# Altium PCB Relay PCB.PcbDoc
Units mm, origin at the board's own origin, x right, y up, seen from the top; angles counter-clockwise.
Board outline 102.36 x 178.55 mm, 4 copper layers (12V, GND, 5V, Signal); 84 components, 70 nets, 365 pads, 27 vias.
Unrouted connection lines stored in the file: 1.
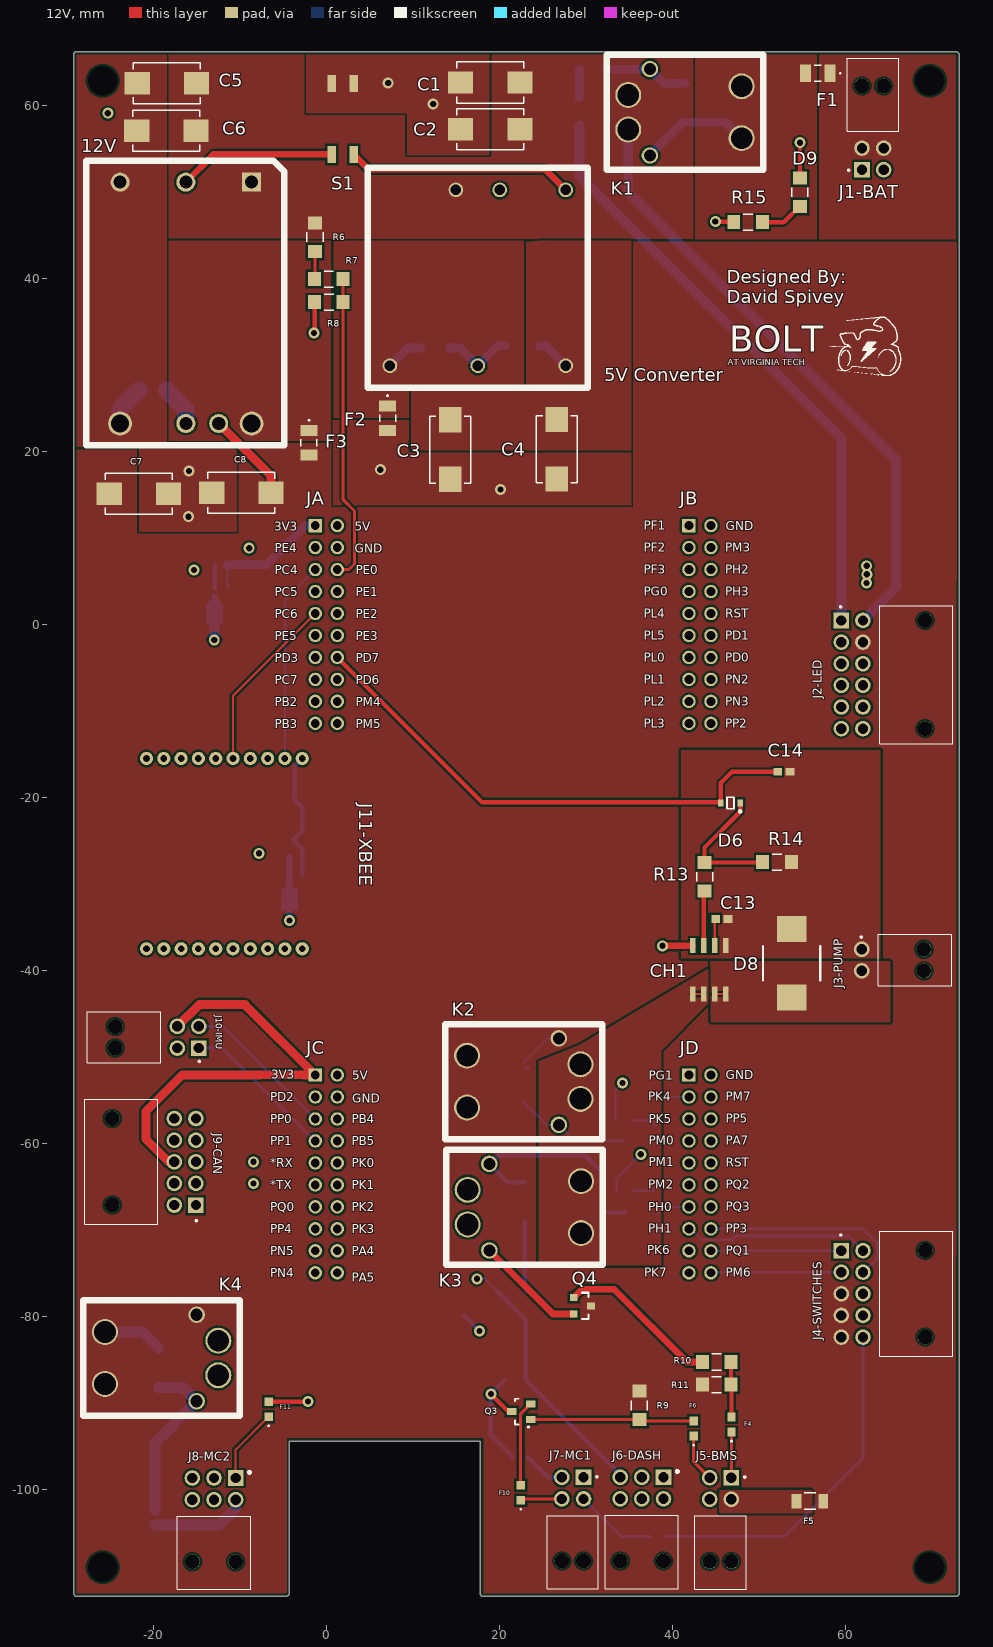
[diagram p0: 12V view]
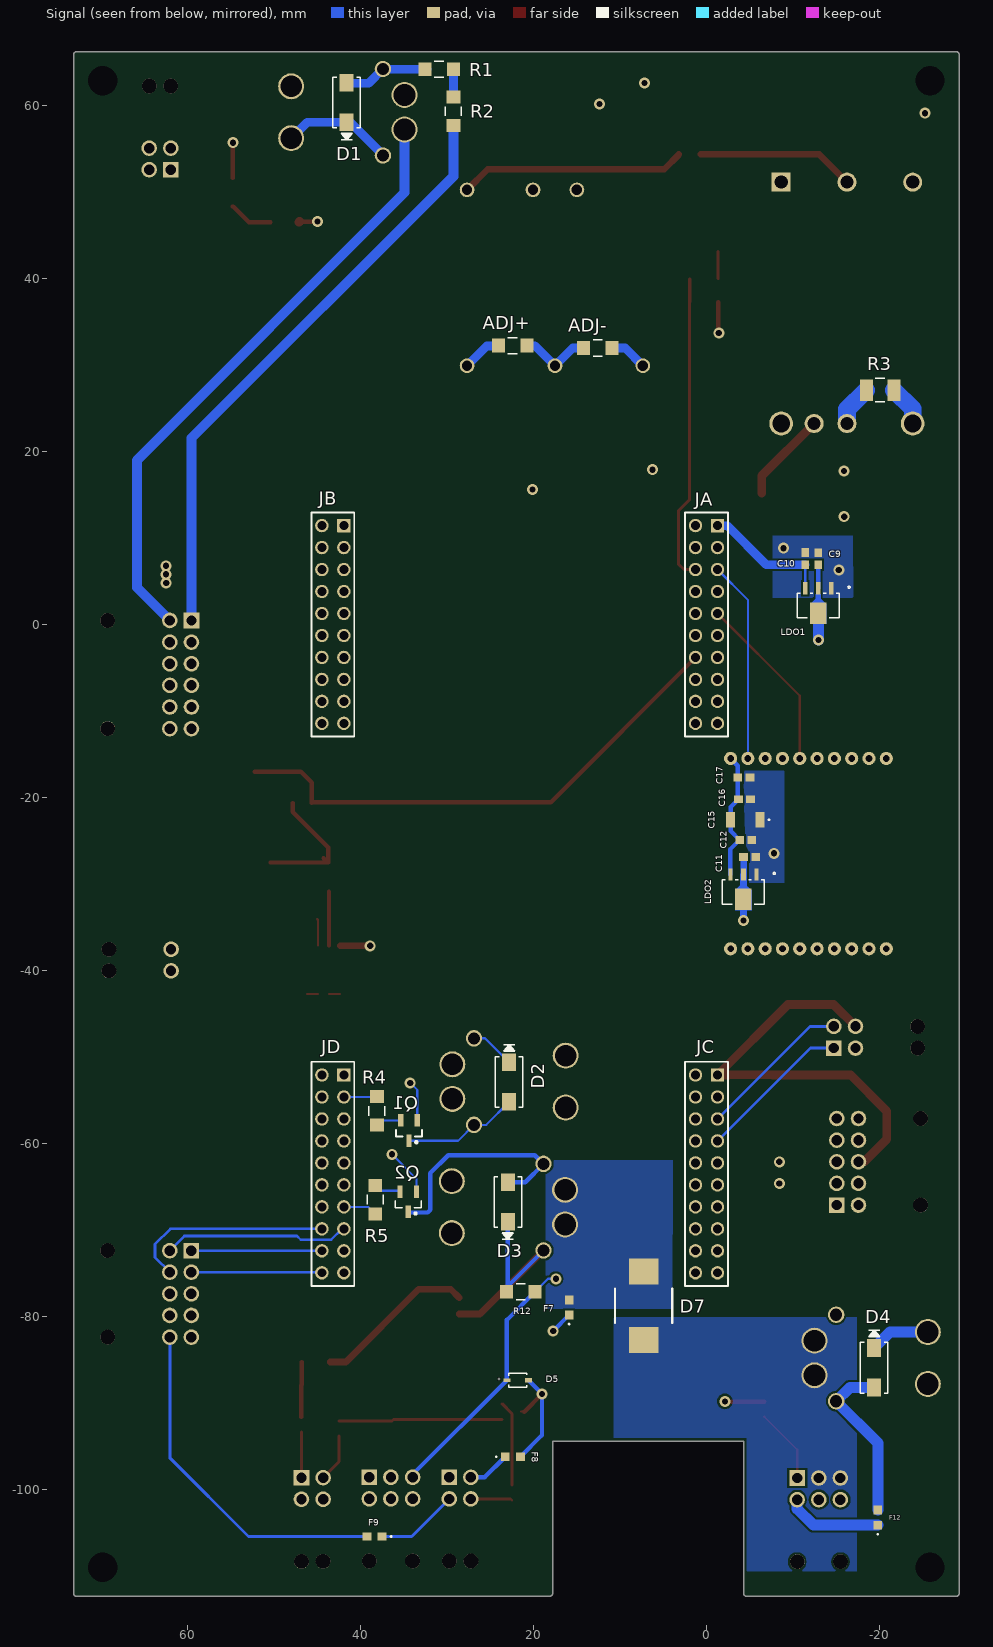
[diagram p1: Signal view, seen from below]
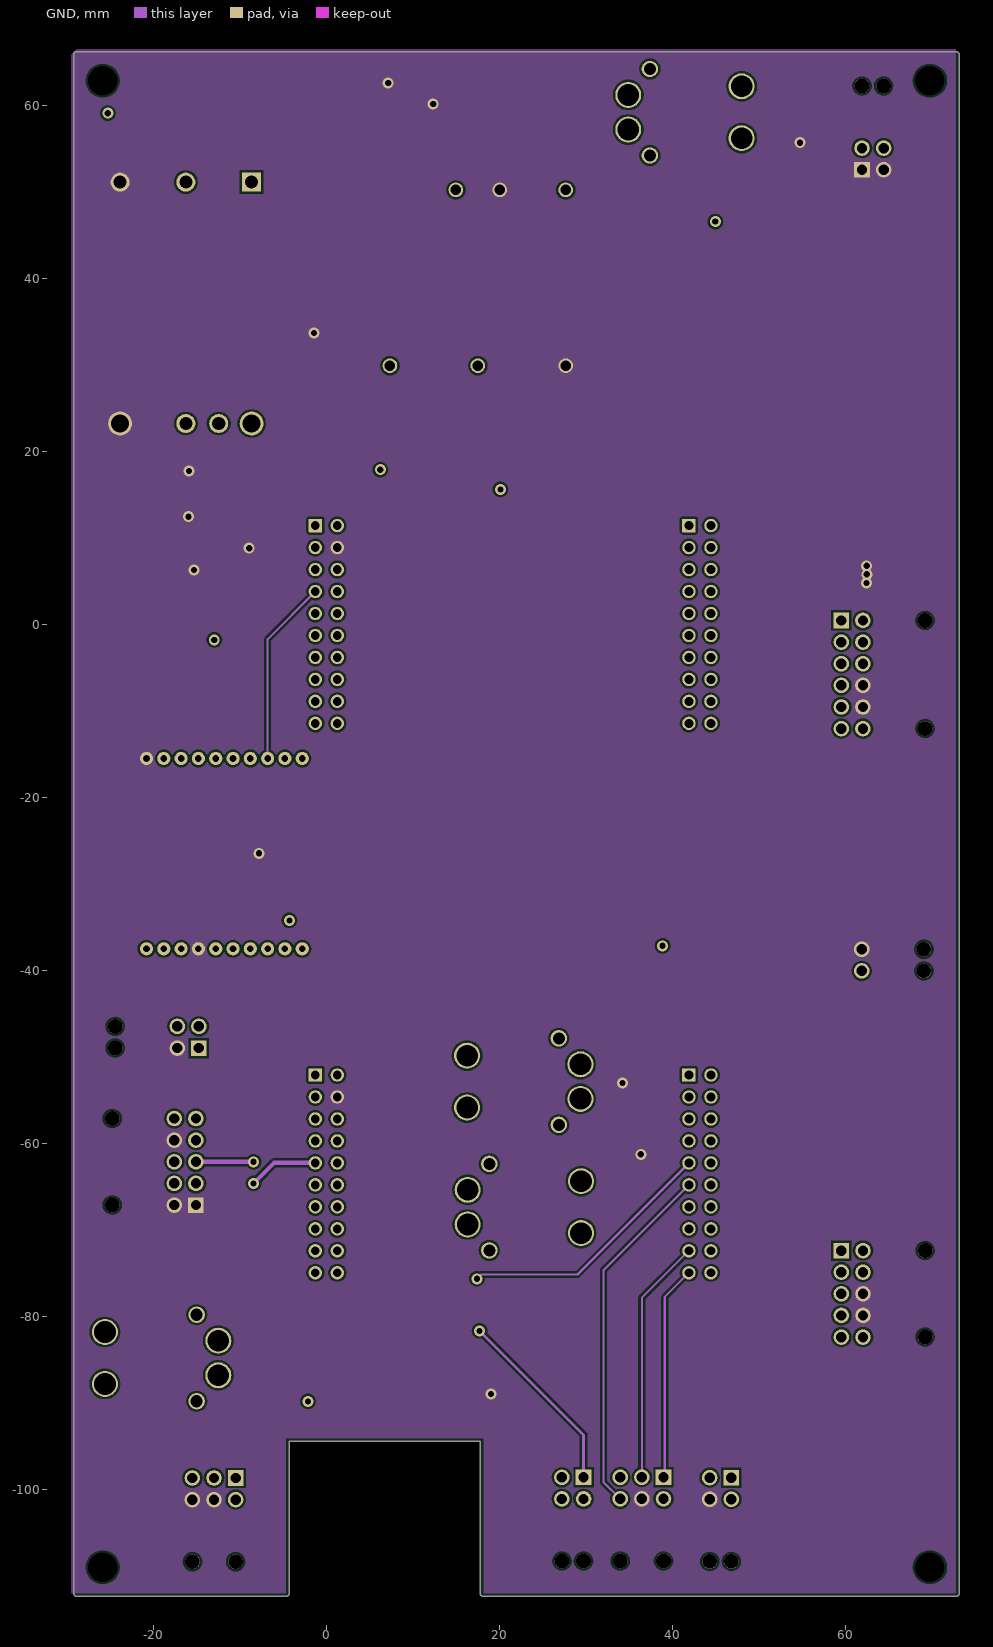
[diagram p2: GND]
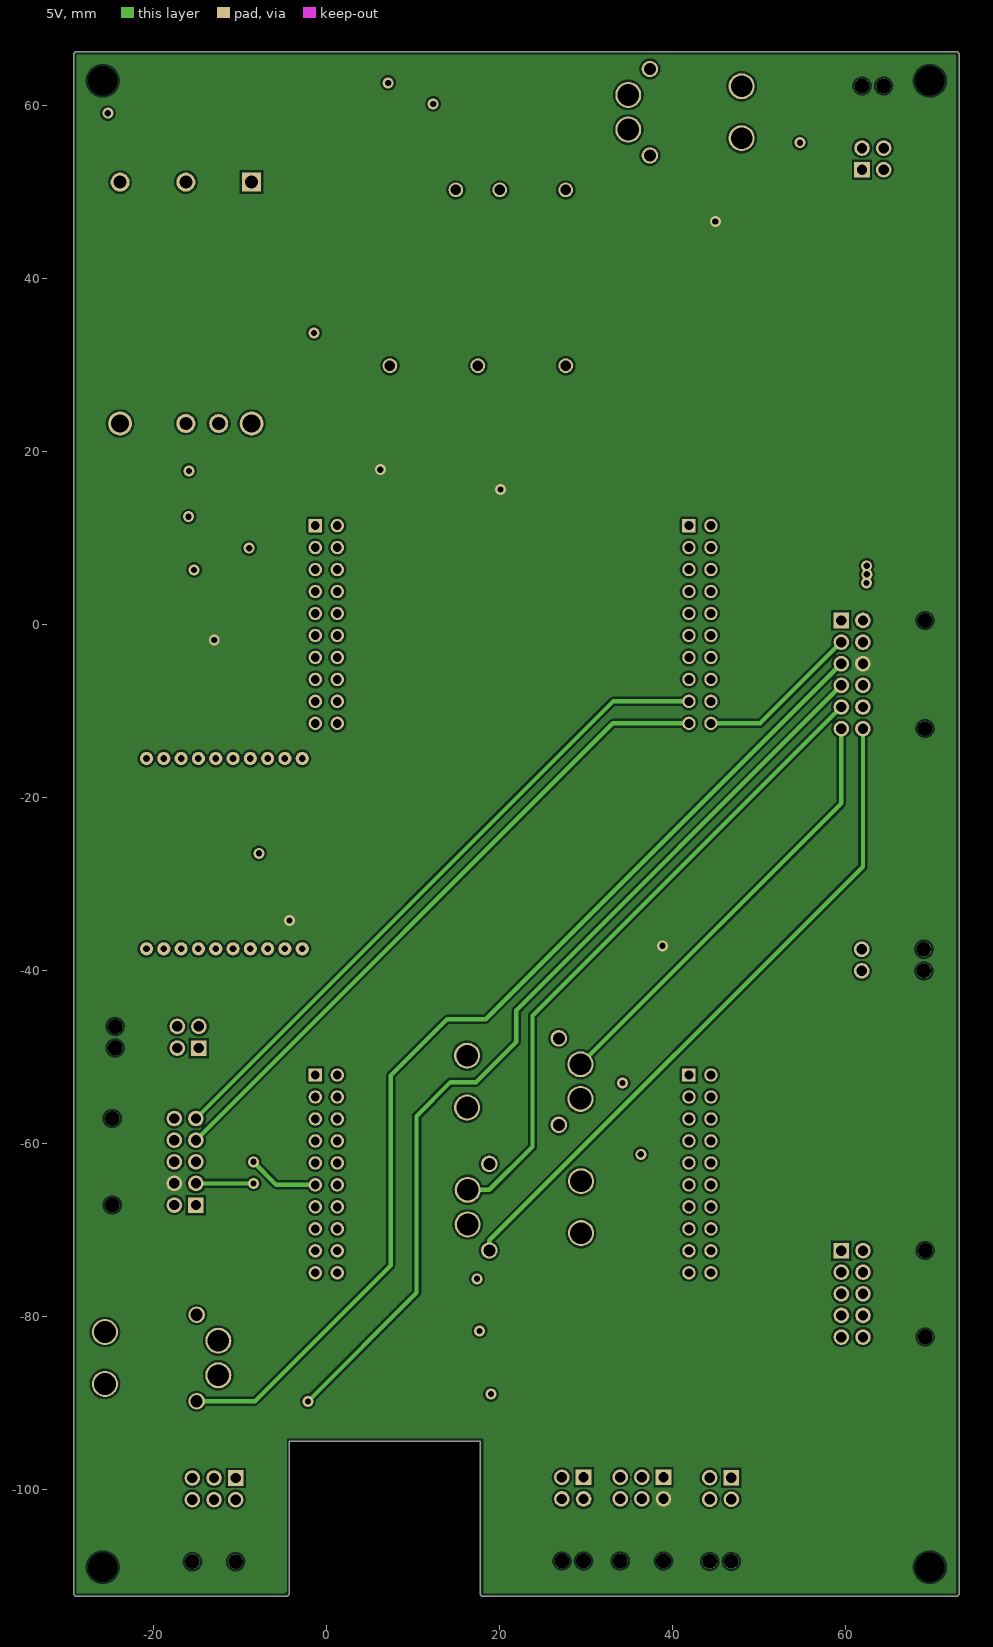
[diagram p3: 5V]
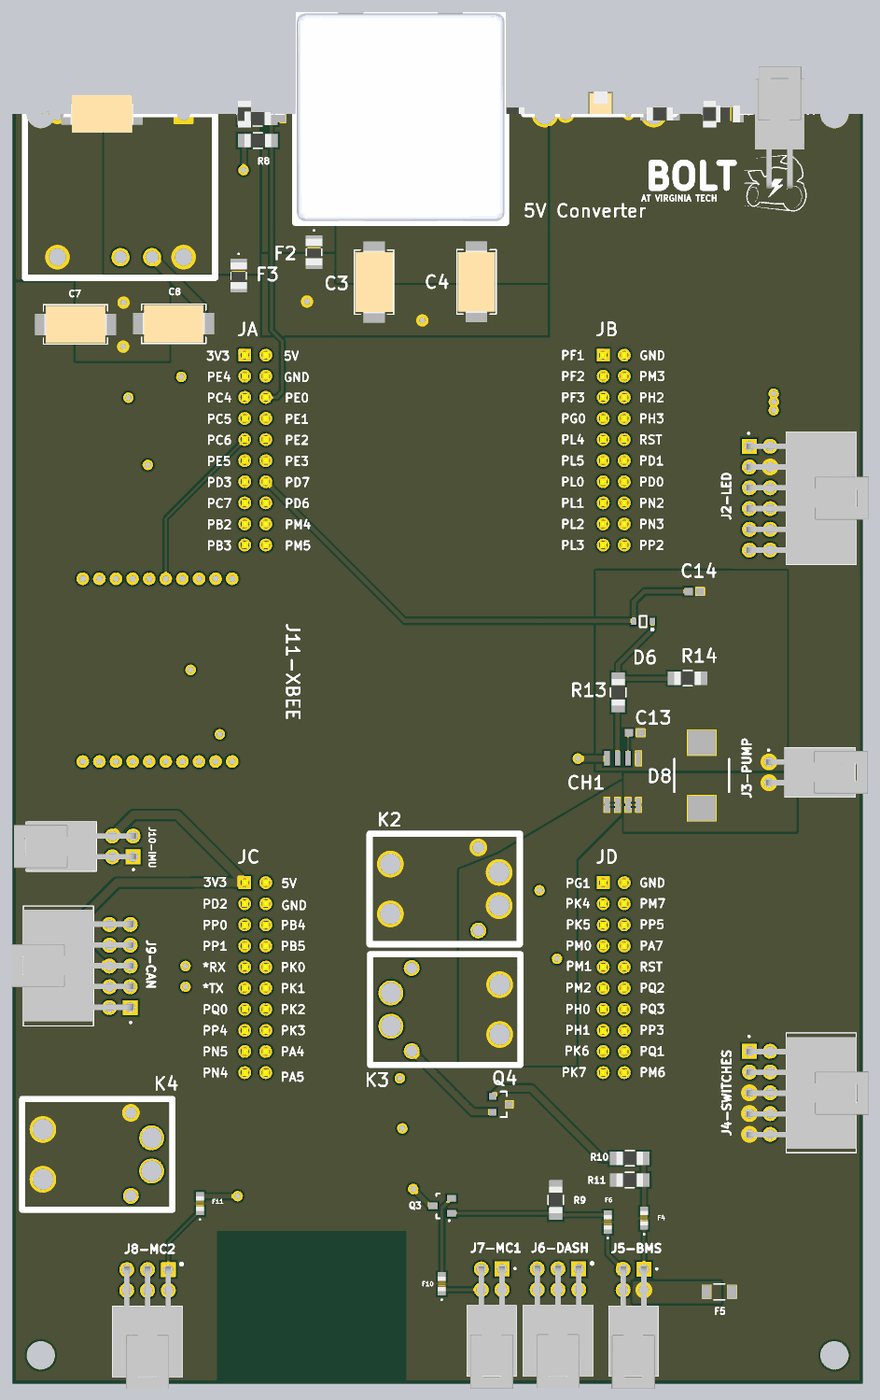
[diagram p4: 3D render of the assembled board from above, using the file's embedded part models]
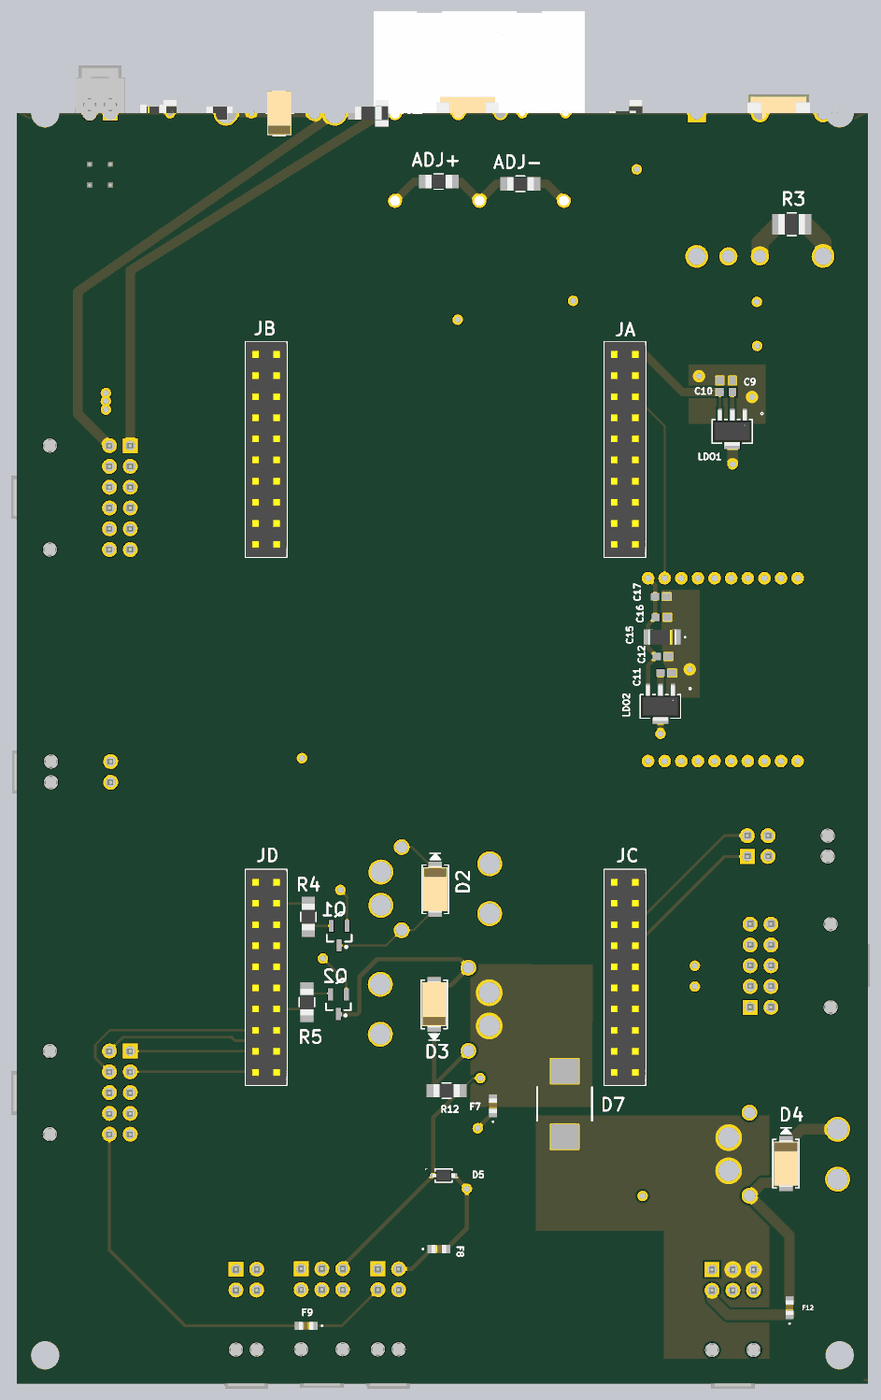
[diagram p5: 3D render of the assembled board from below, using the file's embedded part models]

## Layer stack, top to bottom
Top Solder: solder mask 0.0102, Solder Resist, Dk 3.5
12V: signal copper 0.0356
Dielectric 1: dielectric 0.32, FR-4, Dk 4.8
GND: signal copper 0.0356
Dielectric2: dielectric 0.32, FR-4, Dk 4.8
5V: signal copper 0.0356
Dielectric3: dielectric 0.32, FR-4, Dk 4.8
Signal: signal copper 0.0356
Bottom Solder: solder mask 0.0102, Solder Resist, Dk 3.5

## Board outline
-28.836,-112.335 cw(c-28.836,-111.96) -29.212,-111.957 -29.212,65.84 cw(c-28.836,65.84) -28.836,66.216 72.764,66.216 cw(c72.764,65.84) 73.139,65.84 73.139,-111.865 cw(c72.776,-111.96) 73.151,-111.96 cw(c72.776,-111.96) 72.776,-112.335 18.15,-112.335 cw(c18.15,-111.96) 17.775,-111.96 17.775,-94.382 -4.291,-94.382 -4.291,-111.96 cw(c-4.666,-111.96) -4.666,-112.335

## Design rules (kind name [scope] priority, off if disabled: settings)
Clearance [All] p1: gap=0.254 ignorepadtopadclearanceinfootprint=FALSE except(0: Arc-Hole Track-Hole SMDPad-Hole THPad-Hole Via-Hole Fill-Hole Poly-Hole Region-Hole Text-Hole)
DiffPairsRouting [All] p1: maxlimit=0.254 minlimit=0.254 mostfreqgap=0.254 toplayer_minwidth=0.381 toplayer_maxwidth=0.381 toplayer_prefwidth=0.381 midlayer1_minwidth=0.381 midlayer1_maxwidth=0.381 midlayer1_prefwidth=0.381 midlayer2_minwidth=0.381 midlayer2_maxwidth=0.381 midlayer2_prefwidth=0.381 bottomlayer_minwidth=0.381 bottomlayer_maxwidth=0.381 bottomlayer_prefwidth=0.381 maxuncoupledlength=12.7
HoleSize [All] p1: absolutevalues=TRUE maxlimit=3.81 minlimit=0.025 maxpercent=80.000 minpercent=20.000
MinimumSolderMaskSliver [All] p1: minsoldermaskwidth=0.127
PlaneConnect [All] p1: planeconnectstyle=Direct reliefexpansion=0.508 reliefentries=4 reliefconductorwidth=0.254 reliefairgap=0.254
PolygonConnect [All] p1: connectstyle=Direct reliefconductorwidth=0.254 reliefentries=4 polygonreliefangle="90 Angle" airgapwidth=0.254
RoutingVias [All] p1: holewidth=0.711 width=1.27 viastyle="Through Hole" minholewidth=0.711 minwidth=1.27 maxholewidth=0.711 maxwidth=1.27
SilkToSolderMaskClearance [IsPad] p1: minsilkscreentomaskgap=0.127 clearancetoexposedcopper=TRUE
SolderMaskExpansion [All] p1: expansion=0.102
Width [All] p1: maxlimit=2.032 minlimit=0.254 preferedwidth=0.254 midlayer1_maxwidth=1.016 midlayer2_maxwidth=1.016 minimp=50.000000 maximp=50.000000 favimp=50.000000
25 further rules are at their usual default settings.

## Classes and differential pairs
differential pair V_RX1: +V_RX1_P -V_RX1_N

## Components (designator, comment, footprint, x,y, rotation, side; value= is the part's Value field where it differs from the comment)
"5V Converter" "5V CONVERTER" 5V_CONVERTER 17.514,40.069 r270 top
12V "Component_3" 12V_CONVERTER -16.236,51.124 r270 top
ADJ+ "ERJ-8ENF20R0V" RC1206N 22.402,32.232 r180 bottom value=20
ADJ- "ERJ-8ENF20R0V" RC1206N 12.574,31.957 r180 bottom value=75
C1 "TPSE476K035R0200" CAP_TPS_E 18.951,62.645 r180 top value=Value
C2 "TPSE476K035R0200" CAP_TPS_E 18.95,57.232 r180 top value=Value
C3 "TPSE476K035R0200" CAP_TPS_E 14.303,20.222 r90 top value="220 uF"
C4 "TPSE476K035R0200" CAP_TPS_E 26.645,20.255 r90 top value="220 uF"
C5 "TPSE476K035R0200" CAP_TPS_E -18.425,62.544 r0 top value=Value
C6 "TPSE476K035R0200" CAP_TPS_E -18.494,57.049 r0 top value=Value
C7 "TPSE476K035R0200" CAP_TPS_E -21.656,15.122 r180 top value="220 uF"
C8 "TPSE476K035R0200" CAP_TPS_E -9.824,15.206 r0 top value="220 uF"
C9 "TPSE476K035R0200" "0603 Cap" -12.926,7.601 r270 bottom value=1uF
C10 "TPSE476K035R0200" "0603 Cap" -11.42,7.612 r90 bottom value=1uF
C11 "TPSE476K035R0200" "0603 Cap" -4.983,-26.888 r0 bottom value=1uF
C12 "TPSE476K035R0200" "0603 Cap" -4.526,-24.899 r180 bottom value=1uF
C13 "TPSE476K035R0200" "0603 Cap" 45.721,-34.025 r180 top value=1nF
C14 "Cap" "0603 Cap" 52.893,-17.012 r180 top value=1uF
C15 "Cap" CAP_3216 -4.494,-22.574 r0 bottom value=10uF
C16 "Cap" "0603 Cap" -4.391,-20.193 r0 bottom value=1uF
C17 "Cap" "0603 Cap" -4.326,-17.696 r0 bottom value=47pF
CH1 "Header 4X2A" ACS712 44.265,-39.902 r0 top
D1 "S1M-13-F" SMA 41.598,60.34 r90 bottom value=Value
D2 "S1M-13-F" SMA 22.818,-52.898 r270 bottom value=Value
D3 "S1M-13-F" SMA 22.952,-66.744 r90 bottom value=Value
D4 "S1M-13-F" SMA -19.376,-85.905 r270 bottom value=Value
D5 "DZ2J033M0L" SMINI2-F5-B 21.825,-87.341 r180 bottom value=Value
D6 "Diode" ONSC-SOD-323-2-477-02_G_V 46.72,-20.63 r180 top
D7 "Diode" REV_DIODE 7.261,-78.732 r270 bottom
D8 "Diode" REV_DIODE 53.782,-39.163 r270 top
D9 "LED0" RC1206N 54.74,49.96 r90 top
F1 "3413.0330.22" FUS_SCHURTER_341 56.792,63.72 r180 top value=Value
F2 "3413.0330.22" FUS_SCHURTER_341 7.077,23.831 r270 top value=7A
F3 "3413.0330.22" FUS_SCHURTER_341 -2.006,20.997 r270 top value=15A
F4 "100 mA" 0603 46.835,-92.467 r90 top
F5 "1 A" 0466Series 55.9,-101.327 r0 top
F6 "100 mA" 0603 42.462,-92.929 r90 top
F7 "100 mA" 0603 15.878,-78.94 r90 bottom
F8 "100 mA" 0603 22.384,-96.182 r180 bottom
F9 "100 mA" 0603 38.365,-105.415 r0 bottom
F10 "100 mA" 0603 22.47,-100.35 r90 top
F11 "100 mA" 0603 -6.67,-90.699 r90 top
F12 "100 mA" 0603 -19.802,-103.221 r90 bottom
J1-BAT "Header 4" 4-pin 63.164,53.81 r180 top
J2-LED "Header 12" 12_pinnn 64.457,-5.913 r90 top
J3-PUMP "Header 2" 2-pin 60.636,-38.786 r90 top
J4-SWITCHES "Header 10" 12-pin 60.78,-77.362 r90 top
J5-BMS "Header 4" 4-pin 45.561,-99.855 r0 top
J6-DASH "Header 6" 6-pin 36.469,-99.855 r0 top
J7-MC1 "Header 4" 4-pin 28.479,-99.82 r0 top
J8-MC2 "Header 6" 6-pin -12.98,-99.945 r0 top
J9-CAN "Header 10" 12-pin -16.316,-62.1 r270 top
J10-IMU "Header 4" 4-pin -15.972,-47.705 r270 top
J11-XBEE "Header 10X2A" XBEE -11.782,-26.486 r270 top
JA "Header 10X2A" UC_PINS 0.381,-4.01 r0 top
JB "Header 10X2A" UC_PINS 43.561,-4.01 r0 top
JC "Header 10X2A" UC_PINS 0.381,-67.51 r0 top
JD "Header 10X2A" UC_PINS 43.561,-67.51 r0 top
K1 "Relays" Relays 34.898,57.203 r0 top
K2 "Relays" Relays 29.372,-50.831 r180 top
K3 "Relays" Relays 16.339,-69.344 r0 top
K4 "Relays" Relays -12.485,-82.775 r180 top
LDO1 "MCP1702T-3302E/M" SOT-89_3MC -12.911,2.179 r0 bottom value=Value
LDO2 "MCP1702T-3302E/M" SOT-89_3MC -4.268,-30.906 r0 bottom value=Value
Q1 "NMOS-2" SOT23_M 34.39,-58.49 r270 bottom
Q2 "NMOS-2" SOT23_M 34.48,-66.725 r270 bottom
Q3 "NMOS-2" DMN13H750S 22.517,-90.976 r180 top
Q4 "PMOS-2" PCBComponent_1 29.591,-78.745 r0 top
R1 "Res1" RC1206N 30.898,64.165 r180 bottom value=20
R2 "Res1" RC1206N 29.258,59.315 r270 bottom value=20
R3 "ERJ-14NF1821U" RC1210N -20.066,27.093 r0 bottom value=1.82k
R4 "NTC0805J10K" RC1206N 38.094,-56.225 r90 bottom value=100
R5 "NTC0805J10K" RC1206N 38.275,-66.471 r270 bottom value=100
R6 "ERJ-8ENF20R0V" RC1206N -1.308,44.777 r90 top value=63.4k
R7 "ERJ-8ENF20R0V" RC1206N 0.284,39.926 r180 top value=357
R8 "ERJ-2BSFR10X" RC1206N 0.304,37.252 r180 top value=15k
R9 "ERJ-8ENF20R0V" RC1206N 36.186,-90.253 r270 top value=10k
R10 "ERJ-8ENF20R0V" RC1206N 45.113,-85.242 r180 top value=10k
R11 "ERJ-8ENF20R0V" RC1206N 45.113,-87.855 r180 top value=10k
R12 "ERJ-8ENF20R0V" RC1206N 21.466,-77.121 r180 bottom value=10k
R13 "ERJ-8ENF20R0V" RC1206N 43.713,-29.154 r90 top value=2k
R14 "ERJ-8ENF20R0V" RC1206N 52.087,-27.457 r180 top value=10k
R15 "ERJ-8ENF20R0V" RC1206N 48.74,46.5 r0 top value=442
S1 "Component_2" SW1 3.178,54.121 r90 top

## Footprints (in the part's own frame and the unit in brackets; to place one, negate y for a bottom-side part, rotate by r counter-clockwise, add the part's x,y. Pads: shape width x height; smd on the part's side, far side on the other; paste and mask are expansions set on the pad)
2-pin [mm]
  round 1.8 hole 1.2: 1(1.25,-1.25) 2(-1.25,-1.25)
  round 1.7 hole 1.7 unplated: None(-1.25,-8.43) None(1.25,-8.43)
  silkscreen extent -2.97,-11.63 2.97,-1.1, body extent -2.97,-13.1 2.97,-0.94, height 6.5
4-pin [mm]
  rect 1.8x1.8 hole 1.2: 1(1.25,1.25)
  round 1.8 hole 1.2: 2(-1.25,1.25) 3(1.25,-1.25) 4(-1.25,-1.25)
  round 1.7 hole 1.7 unplated: None(-1.25,-8.43) None(1.25,-8.43)
  silkscreen extent -2.97,-11.63 2.97,1.4, body extent -2.97,-13.1 2.97,1.56, height 9.35
5V_CONVERTER [mm]
  round 1.7 hole 1.2: 1(-10.16,10.16) 2(-10.16,2.54) 3(-10.16,-2.54) 4(10.16,-10.16) 5(10.16,0) 6(10.16,10.16)
  silkscreen extent -12.7,-12.7 12.7,12.7, body extent -12.7,-12.7 12.7,12.7, height 10.1
6-pin [mm]
  rect 1.8x1.8 hole 1.2: 1(2.5,1.298)
  round 1.8 hole 1.2: 2(0,1.298) 3(-2.5,1.298) 4(2.5,-1.202) 5(0,-1.202) 6(-2.5,-1.202)
  round 1.7 hole 1.7 unplated: None(-2.5,-8.382) None(2.5,-8.382)
  silkscreen extent -4.22,-11.58 4.24,2.1, body extent -4.22,-13.03 4.22,1.63, height 9.35
12-pin [mm]
  rect 1.8x1.8 hole 1.2: 1(5,1.25)
  round 1.8 hole 1.2: 2(2.5,1.25) 3(0,1.25) 4(-2.5,1.25) 5(-5,1.25) 6(5,-1.25) 7(2.5,-1.25) 8(0,-1.25) 9(-2.5,-1.25) 10(-5,-1.25)
  round 1.7 hole 1.7 unplated: None(-5,-8.43) None(5,-8.43)
  silkscreen extent -7.22,-11.63 7.22,1.4, body extent -6.76,-13.09 6.68,1.57, height 9.35
12_pinnn [mm]
  rect 1.8x1.8 hole 1.2: 1(6.377,4.933)
  round 1.8 hole 1.2: 2(3.877,4.933) 3(1.377,4.933) 4(-1.123,4.933) 5(-3.623,4.933) 6(-6.123,4.933) 7(6.377,2.433) 8(3.877,2.433) 9(1.377,2.433) 10(-1.123,2.433) 11(-3.623,2.433) 12(-6.123,2.433)
  round 1.7 hole 1.7 unplated: None(-6.123,-4.747) None(6.377,-4.747)
  silkscreen extent -7.84,-7.95 8.1,5.12, body extent -7.84,-9.41 8.1,5.25, height 9.35
12V_CONVERTER [mm]
  rect 2.2x2.2 hole 1.52: 1(0,7.6)
  round 2.2 hole 1.52: 2(0,0) 3(0,-7.6) 5(27.9,3.8) 6(27.9,0)
  round 2.75 hole 2.07: 4(27.9,7.6) 7(27.9,-7.6)
  silkscreen extent -2.5,-11.5 30.4,11.4, body extent -2.26,-13.96 30.64,18.62, height 12.1
0466Series [mil]
  rect 45x65 smd paste+0 mask+1: 1(-60.5,0) 2(60.5,0)
  silkscreen extent -26,-38 26,38, body extent -62,-30 63,30, height 23
0603 [mil]
  rect 40x38 smd paste+0 mask+0: 1(-34.48,0.01) 2(34.5,0.01)
  silkscreen extent -78,-3 -73,3, body extent -34,-19 34,19, height 35
"0603 Cap" [mm]
  rect 1x0.9 smd: 1(-0.7,0) 2(0.7,0)
  body extent -0.8,-0.45 0.8,0.45, height 0.9
ACS712 [mm]
  rect 0.65x1.75 smd: 1(-1.905,-2.8) 2(-0.635,-2.8) 3(0.635,-2.8) 4(1.905,-2.8) 5(1.905,2.8) 6(0.635,2.8) 7(-0.635,2.8) 8(-1.905,2.8)
  body extent -2.5,-3.1 2.5,3.1, height 1.75
CAP_3216 [mil]
  rect 40x71 smd paste+0 mask+0: 1(-67,0) 2(67,0)
  silkscreen extent -111,-3 -105,3, body extent -67,-36 67,36, height 49
CAP_TPS_E [mil]
  rect 115x102 smd paste+0 mask+0: 1(-135,0) 2(135,0)
  silkscreen extent -152,-94 152,94, body extent -147,-88 147,89, height 170
DMN13H750S [mm]
  rect 1.1x0.8 smd: 1(-1.1,0.9) 2(-1.1,-0.9) 3(1.1,0)
  silkscreen extent -0.9,-1.5 0.7,1.82, body extent -0.7,-1.5 0.7,1.5, height 1
FUS_SCHURTER_341 [mil]
  rect 50x79 smd paste+0 mask+0: 1(-55,0) 2(55,0)
  silkscreen extent -106,-36 16,36, body extent -63,-39 115,45, height 24
ONSC-SOD-323-2-477-02_G_V [mm] "SOD, 2-Leads, Body 1.7x1.25mm"
  rect 0.63x0.83 smd: 1(-1.115,0) 2(1.115,0)
  silkscreen extent -1.24,-0.67 0.4,1.09, body extent -0.85,-0.63 0.85,0.63, height 1.06
PCBComponent_1 [mm]
  rect 0.9x0.8 smd: 1(-1,0.95) 2(-1,-0.95) 3(1,0)
  silkscreen extent 0,-1.52 0.7,1.52, body extent -0.7,-1.52 0.7,1.52, height 1.11
RC1206N [mm]
  rect 1.5x1.6 smd paste+0 mask+0: 1(-1.65,0) 2(1.65,0)
  silkscreen extent -0.54,-0.93 0.54,0.93, body extent -1.6,-0.8 1.6,0.8, height 0.71
RC1210N [mm]
  rect 1.5x2.5 smd paste+0 mask+0: 1(-1.6,0) 2(1.6,0)
  silkscreen extent -0.54,-1.38 0.54,1.38, body extent -1.6,-1.25 1.6,3.49, height 0.71
Relays [mm]
  round 3 hole 2.5: 1(0,0) 2(0,4) 4(13.1,5) 5(13.1,-1)
  round 1.9 hole 1.4: 3(2.5,7) 6(2.5,-3)
  silkscreen extent -2.5,-4.65 15.6,8.65, body extent -1.35,-4.15 14.35,8.15, height 14
REV_DIODE [mm]
  rect 3x3.39 smd: 1(-3.95,0) 2(3.95,0)
  silkscreen extent -2,-3.3 2,3.3, body extent -4.05,-3.1 4.05,3.1, height 2.65
SMA [mil]
  rect 80x64.17 smd paste+0 mask+0: 1(-90,0) 2(90,0)
  silkscreen extent -170,-62 115,62, body extent -110,-57 110,57, height 93
SMINI2-F5-B [mil]
  rect 32x16 smd: 1(-49,0)
  rect 32x22 smd: 2(49,0)
  silkscreen extent -41,-32 41,32, body extent -53,-26 53,27, height 32
SOT23_M [mm] "SOT23, 3-Leads, Body 2.9x1.3mm, Pitch 0.95mm, Lead Span 2.3mm - Reverse Pinning, IPC Low Density"
  rect 1.45x0.6 smd: 1(1.175,0) 2(-1.175,-0.95) 3(-1.175,0.95)
  silkscreen extent -0.1,-1.5 1.47,1.5, body extent -0.7,-1.5 0.7,1.5, height 1.1
SOT-89_3MC [mm]
  rect 0.483x1.422 smd paste+0 mask+0: 1(-1.5,-2.011) 3(1.5,-2.011)
  rect 0.559x1.422 smd paste+0 mask+0: 2(0,-2.011)
  rect 1.9x2.5 smd: 2(0.01,0.87)
  12V region: 0.279,-1.3 -0.279,-1.3 -0.279,-0.783 -0.94,-0.173 -0.94,2.113 0.94,2.113 0.94,-0.173 0.279,-0.808
  silkscreen extent -3.7,-2.27 2.43,1.43, body extent -2.3,-2.52 2.3,5, height 1.65
SW1 [mm]
  rect 2x1 smd: 1(0.2,2.54) 2(0.2,0) 3(8.4,0) 4(8.4,2.54)
  body extent 1.2,-1.74 15.01,8.24, height 3.1
UC_PINS [mm]
  rrect6% 1.55x1.55 hole 1.02: 1(-1.651,15.44)
  round 1.55 hole 1.02: 2(-1.651,12.9) 3(-1.651,10.36) 4(-1.651,7.82) 5(-1.651,5.28) 6(-1.651,2.74) 7(-1.651,0.2) 8(-1.651,-2.34) 9(-1.651,-4.88) 10(-1.651,-7.42) 11(0.889,15.44) 12(0.889,12.9) 13(0.889,10.36) 14(0.889,7.82) 15(0.889,5.28) 16(0.889,2.74) 17(0.889,0.2) 18(0.889,-2.34) 19(0.889,-4.88) 20(0.889,-7.42)
  body extent -2.86,-8.94 2.1,16.96, height 8.51
XBEE [mil]
  round 60 hole 30: 1(-433.07,354.33) 2(-433.07,275.59) 3(-433.07,196.85) 4(-433.07,118.11) 5(-433.07,39.37) 6(-433.07,-39.37) 7(-433.07,-118.11) 8(-433.07,-196.85) 9(-433.07,-275.59) 10(-433.07,-354.33) 11(433.07,-354.33) 12(433.07,-275.59) 13(433.07,-196.85) 14(433.07,-118.11) 15(433.07,-39.37) 16(433.07,39.37) 17(433.07,118.11) 18(433.07,196.85) 19(433.07,275.59) 20(433.07,354.33)
  body extent -480,-658 670,1139, height 312

## Part data
ADJ+ ADJ- C1 C2 C3 C4 C5 C6 C7 C8 C9 C10 C11 C12 C13 D1 D2 D3 D4 D5 F1 F2 F3 R3 R4 R5 R6 R7 R9 R10 R11 R12 R13 R14 R15: "Imported", C="Copyright (C) 2015 Accelerated Designs. All rights reserved", RefDes=RefDes, Type=DEV
  ADJ+ ADJ- R6 R7 R9 R10 R11 R12 R13 R14 R15: Built_By=EMA_UL_Team, Manufacturer_Part_Number=ERJ-8ENF20R0V, Vendor=Panasonic
  C1 C2 C3 C4 C5 C6 C7 C8 C9 C10 C11 C12 C13: Built_By=EMA_UL_Team, Manufacturer_Part_Number=TPSE476K035R0200, Vendor="AVX Corporation"
  D1 D2 D3 D4: Built_By=EMA_UL_Team, Manufacturer_Part_Number=S1M-13-F, Vendor="Diodes Inc"
  D5: Copyright="Copyright (C) 2015 Accelerated Designs. All rights reserved", Manufacturer_Part_Number=DZ2J033M0L, Vendor=Panasonic
  F1 F2 F3: Built_By=EMA_UL_Team, Manufacturer_Part_Number=3413.0330.22, Vendor="Schurter Inc"
  R3: Built_By=EMA_UL_Team, Manufacturer_Part_Number=ERJ-14NF1821U, Vendor=Panasonic
  R4 R5: Built_By=EMA_UL_Team, Manufacturer_Part_Number=NTC0805J10K, Vendor="TE Connectivity"
C14 C15 C16 C17: "Capacitor", LatestRevisionDate=17-Jul-2002, LatestRevisionNote="Re-released for DXP Platform.", PackageDescription="Radial Cap, Thru-Hole; 2 Leads; 0.3 in Pin Spacing", PackageReference=RAD-0.3, Published=8-Jun-2000, Publisher="Altium Limited"
CH1: "Header, 4-Pin, Dual row", LatestRevisionDate=17-Jul-2002, LatestRevisionNote="Re-released for DXP Platform.", Publisher="Altium Limited"
D6 D7 D8: "Default Diode", Code_JEDEC=DO-214-AB, LatestRevisionDate=17-Jul-2002, LatestRevisionNote="Re-released for DXP Platform.", PackageDescription="DO-214-AB/SMC; 2 C-Bend Leads; Body 7.9 x 5.9 mm, inc. leads (LxW)", PackageReference=SMC, PackageVersion=Sep-1996, Published=8-Jun-2000, Publisher="Altium Limited"
D9: "Typical INFRARED GaAs LED", LatestRevisionDate=08-Jul-2005, LatestRevisionNote="Mech Layer 1 removed.", PackageDescription="LED; 2 Leads", PackageReference=LED-0, Published=8-Jun-2000, Publisher="Altium Limited"
F4 F5 F6 F7 F8 F9 F10 F11 F12: library part "Fuse 2", "Fuse", LatestRevisionDate=17-Jul-2002, LatestRevisionNote="Re-released for DXP Platform.", PackageDescription="Thru-Hole; 2 Leads", PackageReference=PIN-W2/E2.8, Published=8-Jun-2000, Publisher="Altium Limited"
J1-BAT J5-BMS J7-MC1 J10-IMU: "Header, 4-Pin", LatestRevisionDate=17-Jul-2002, LatestRevisionNote="Re-released for DXP Platform.", Publisher="Altium Limited"
J2-LED: "Header, 12-Pin", LatestRevisionDate=17-Jul-2002, LatestRevisionNote="Re-released for DXP Platform.", Publisher="Altium Limited"
J3-PUMP: "Header, 2-Pin", LatestRevisionDate=17-Jul-2002, LatestRevisionNote="Re-released for DXP Platform.", Publisher="Altium Limited"
J4-SWITCHES J9-CAN: "Header, 10-Pin", LatestRevisionDate=17-Jul-2002, LatestRevisionNote="Re-released for DXP Platform.", Publisher="Altium Limited"
J6-DASH J8-MC2: "Header, 6-Pin", LatestRevisionDate=17-Jul-2002, LatestRevisionNote="Re-released for DXP Platform.", Publisher="Altium Limited"
J11-XBEE JA JB JC JD: "Header, 10-Pin, Dual row", LatestRevisionDate=17-Jul-2002, LatestRevisionNote="Re-released for DXP Platform.", Publisher="Altium Limited"
LDO1 LDO2: "Imported", Manufacturer_Part_Number=MCP1702T-3302E/MB, Built_By=EMA_UL_Team, C="Copyright (C) 2015 Accelerated Designs. All rights reserved", RefDes=RefDes, Type=DEV, Vendor=Microchip
Q1 Q2 Q3: "N-Channel Power MOSFET", ComponentLink1Description="Manufacturer Link", ComponentLink1URL=http://www.irf.com/, DatasheetVersion=PD-9.814, LatestRevisionDate=17-Jul-2002, LatestRevisionNote="Re-released for DXP Platform.", Note="Pin 2 is electrically connected to pin 4.", PackageDescription="TO, Thru-Hole, Vertical, Heatsink Mounted; 3 In-Line Leads; Pitch 2.54 mm", PackageReference=TO-220AB, PackageVersion=Feb-1997, Published=8-Jun-2000, Publisher="Altium Limited"
Q4: "P-Channel Power MOSFET", ComponentLink1Description="Manufacturer Link", ComponentLink1URL=http://www.irf.com/, DatasheetVersion=PD-9.390D, LatestRevisionDate=17-Jul-2002, LatestRevisionNote="Re-released for DXP Platform.", Note="Pin 4 not drawn and electrically connected to Pin 2.", PackageDescription="TO, Thru-Hole, Vertical, Heatsink Mounted; 3 In-Line Leads; Pitch 2.54 mm", PackageReference=TO-220AB, PackageVersion=Feb-1997, Published=8-Jun-2000, Publisher="Altium Limited"
R1 R2: "Resistor", LatestRevisionDate=17-Jul-2002, LatestRevisionNote="Re-released for DXP Platform.", PackageDescription="Axial Device, Thru-Hole; 2 Leads; 0.3 in Pin Spacing", PackageReference=AXIAL-0.3, Published=8-Jun-2000, Publisher="Altium Limited"
R8: library part ERJ-8ENF20R0V, "Imported", Built_By=EMA_UL_Team, C="Copyright (C) 2015 Accelerated Designs. All rights reserved", Manufacturer_Part_Number=ERJ-8ENF20R0V, RefDes=RefDes, Type=DEV, Vendor=Panasonic

## Free pads (board coordinates)
  round 1.524 hole 3.4: None(-25.836,62.84) None(-25.836,-108.96) None(69.764,-108.96) None(69.764,62.84)

## Via types
v1: diameter 1.27, hole 0.711, 12V to Signal, 27 vias

## Nets (pads, with @x,y where several pads share a name; then routed paths per layer and width w, separated by ;. In a path a pad name is that pad's centre, name@x,y a point inside that pad or via, vN(x,y) a via of type N, cw(c..) or ccw(c..) an arc to the next point about the centre after c; other vN are vias at no path point)
GND: 12V.3 12V.7 "5V Converter.2" "5V Converter.6" ADJ+.1 C1.2 C2.2 C3.2 C4.2 C5.1 C6.1 C7.1 C8.1 C9.1 C10.2 C11.1 C12.2 C13.1 C14.1 C15.1 C16.1 C17.1 CH1.5 D5.2 D8.1 D9.2 F8.2 J1-BAT.1 J1-BAT.2 J2-LED.10 J2-LED.11 J3-PUMP.1 J4-SWITCHES.8 J4-SWITCHES.9 J5-BMS.4 J6-DASH.5 J8-MC2.5 J8-MC2.6 J9-CAN.1 J9-CAN.6 J9-CAN.9 J10-IMU.3 J11-XBEE.10 J11-XBEE.14 JA.12 JC.12 LDO1.1 LDO2.1 Q1.3 Q2.3 Q3.3 R3.1 R8.2 R14.1 S1.3 S1.4 | length 40.3
  12V w0.254: v1(-1.419,33.698) v1@-1.346,33.771 ; Q3.3@21.045,-90.976 Q3.3 ; v1@54.71,55.71 v1(54.74,55.68) ; v1@62.415,4.831 v1(62.447,4.799)
  12V w0.5: v1@-1.346,33.771 R8.2 ; D9.2 v1(54.74,55.68)
  12V w0.508: v1(19.016,-88.948) Q3.3@21.045,-90.976
  Signal w0.254: v1(19.016,-88.948) v1@19.016,-88.905 ; Q1.3 33.44,-53.79 v1(34.241,-52.989) ; Q2.3 33.53,-64.05 v1(36.35,-61.23)
  Signal w0.508: v1(19.016,-88.948) 19.016,-93.69 F8.2 ; v1@19.016,-88.905 D5.2
  Signal w1: ADJ+.1@24.684,32.181 25.402,32.181 27.674,29.909
  Signal w2.032: 12V.7 -23.836,24.922 R3.1
  other v1: -7.792,-26.449 62.464,5.804 -15.289,6.311 62.456,6.787 -8.916,8.815 -15.914,12.453 -15.875,17.753 12.352,60.164 7.153,62.592
"Net5V Converter_1": "5V Converter.1" S1.2 | length 26.2
  12V w0.75: S1.2 4.878,52.62 25.283,52.62 27.674,50.229
"Net5V Converter_4": "5V Converter.4" ADJ-.2 F2.1 | length 4.4
  Signal w1: 7.354,29.909 9.401,31.957 ADJ-.2
"Net5V Converter_5": "5V Converter.5" ADJ+.2 ADJ-.1 | length 8.3
  Signal w1: ADJ-.1 15.466,31.957 17.514,29.909 19.836,32.232 ADJ+.2
Net12V_2: 12V.2 S1.1 | length 18.2
  12V w0.75: 12V.2 -13.04,54.321 S1.1
Net12V_4: 12V.4 F3.1
Net12V_5: 12V.5 C7.2 C8.2 D2.1 D4.1 F3.2 F5.2 J2-LED.8 J4-SWITCHES.3 J4-SWITCHES.4 J4-SWITCHES.5 K2.4 K2.5 K2.6 K4.4 K4.5 K4.6 Q4.3 R9.1 R11.2 | length 23.1
  12V w1.016: 12V.5 -6.395,17.183 C8.2
  Signal w0.254: D2.1 25.6,-47.831 K2.6 ; D2.1@23.019,-51.293 D2.1@23.411,-51.293
  Signal w1.27: K4.5 -21.219,-81.775 D4.1
Net12V_6: 12V.6 R3.2 | length 4.8
  Signal w2.032: R3.2 -16.236,24.863 12V.6
NetC3_1: C3.1 C4.1 C9.2 C11.2 CH1.8 F2.2 J2-LED.9 J6-DASH.4 J9-CAN.7 LDO1.2 LDO2.2 R15.1 | length 19
  12V w0.254: J9-CAN.7@-17.677,-64.71 J9-CAN.7 ; CH1.8@42.325,-37.138 CH1.8
  12V w0.5: v1(44.96,46.56) R15.1@47.03,46.56
  12V w0.762: v1(38.866,-37.138) CH1.8@42.325,-37.138
  12V w1.016: R15.1@47.03,46.56 R15.1
  Signal w0.254: LDO1.2@-12.952,1.266 LDO1.2@-12.905,1.312 ; C9.2 C9.2@-12.911,6.885 ; LDO2.2@-4.283,-28.879 -4.268,-28.895 LDO2.2@-4.273,-28.9
  Signal w0.508: LDO1.2@-12.911,4.19 C9.2@-12.911,6.885
  Signal w0.762: LDO2.2@-4.283,-28.879 C11.2 ; v1(-4.273,-34.209) LDO2.2@-4.273,-28.9
  Signal w1.27: v1(-12.952,-1.786) LDO1.2@-12.952,1.266
  other v1: 20.127,15.607 6.236,17.885
NetC10_1: C10.1 JA.1 LDO1.3 | length 14.7
  Signal w0.254: C10.1 -11.411,6.903 LDO1.3
  Signal w1: C10.1 -6.91,6.912 -2.392,11.43 JA.1@-1.277,11.43
NetC12_1: C12.1 C15.2 C16.2 C17.2 J11-XBEE.1 LDO2.3 | length 15
  Signal w0.254: C16.2 C16.2@-3.626,-20.127
  Signal w0.508: C16.2 -2.792,-21.092 C15.2 -2.792,-23.865 C12.1 -2.768,-25.958 LDO2.3 ; C16.2@-3.626,-20.127 C17.2 -3.626,-16.33 J11-XBEE.1
NetC13_2: C13.2 CH1.6 | length 3.1
  12V w0.254: CH1.6 44.9,-34.146 C13.2
NetC14_2: C14.2 D6.2 JA.17 | length 60.8
  12V w0.5: JA.17@1.263,-3.81 18.011,-20.558 45.54,-20.558 D6.2@45.605,-20.623 ; D6.2 D6.2@45.605,-20.623 ; C14.2 46.879,-17.012 45.605,-18.286 D6.2@45.605,-20.623
NetCH1_1: CH1.1 CH1.2 J2-LED.6 K2.1 K2.2 K3.4 K3.5 | length 52.6
  12V w0.254: CH1.1 CH1.2
  5V w0.508: K2.1 59.524,-20.679 J2-LED.6
NetCH1_3: CH1.3 CH1.4 D8.2 J3-PUMP.2 | length 1.3
  12V w0.254: CH1.3 CH1.4
NetCH1_7: CH1.7 R13.1 | length 6.3
  12V w0.254: R13.1@43.63,-30.887 R13.1
  12V w0.5: CH1.7 R13.1@43.63,-30.887
NetD1_2: D1.2 K1.3 R1.1 | length 9.9
  Signal w0.254: K1.3@37.36,64.165 K1.3
  Signal w1.016: R1.1@32.3,64.165 K1.3@37.36,64.165 ; K1.3 39.049,62.552 D1.2@41.49,62.552
NetD2_2: D2.2 K2.3 Q1.1 | length 13.4
  Signal w0.254: D2.2 25.465,-57.831 K2.3 28.706,-59.665 Q1.1
NetD3_1: D3.1 J2-LED.12 K3.6 Q4.2 R12.1 | length 105
  12V w0.762: K3.6 26.191,-79.695 Q4.2
  5V w0.508: K3.6 18.839,-71.178 62.024,-27.994 J2-LED.12
  Signal w0.254: R12.1@22.952,-76.456 22.952,-76.958 R12.1
  Signal w0.508: K3.6 22.952,-76.456 D3.1
NetD3_2: D3.2 K3.3 Q2.1 | length 26.3
  Signal w0.508: D3.2 20.954,-64.458 K3.3 19.851,-61.332 29.855,-61.332 31.93,-63.407 31.93,-67.662 32.228,-67.96 34.434,-67.96 34.48,-67.914 Q2.1
NetD4_2: D4.2 F12.2 J2-LED.3 K4.3 | length 142.3
  5V w0.508: K4.3 -8.236,-89.775 7.455,-74.085 7.455,-52.129 13.96,-45.624 18.436,-45.624 J2-LED.3
  Signal w1.27: F12.2 -19.802,-94.593 K4.3 -16.569,-88.191 D4.2
NetD5_1: D5.1 J6-DASH.3 JD.5 R12.2 | length 60.4
  GND w0.254: v1(17.41,-75.62) 17.91,-75.12 29.02,-75.12 JD.5
  Signal w0.254: v1(17.41,-75.62) 18.315,-75.62 R12.2 ; J6-DASH.3 J6-DASH.3@33.969,-98.24
  Signal w0.508: R12.2 23.07,-80.376 D5.1 J6-DASH.3@33.969,-98.24
NetD6_1: D6.1 R13.2 R14.2 | length 16.1
  12V w0.254: D6.1 D6.1@47.907,-20.558 ; R14.2@50.39,-27.504 R14.2
  12V w0.5: R13.2@44.263,-27.004 R13.2@43.763,-27.504 ; D6.1 47.835,-21.645 43.713,-25.767 R13.2 R13.2@43.763,-27.504 ; R14.2@50.39,-27.504 R13.2@43.763,-27.504
NetD7_1: D7.1 F7.2 J2-LED.5 K3.1 K3.2 | length 75.2
  5V w0.508: K3.2 18.843,-65.344 23.828,-60.358 23.828,-45.232 J2-LED.5
NetD7_2: D7.2 J8-MC2.2 J8-MC2.3 K4.1 K4.2
NetD9_1: D9.1 R15.2 | length 5.1
  12V w0.5: R15.2 52.88,46.5 54.69,48.31 D9.1 D9.1@54.79,48.31
NetF1_1: F1.1 J1-BAT.3 J1-BAT.4
NetF4_1: F4.1 J5-BMS.1 | length 5.3
  12V w0.254: J5-BMS.1 J5-BMS.1@46.834,-98.581
  12V w0.35: J5-BMS.1@46.834,-98.581 F4.1
NetF4_2: F4.2 R10.1 R11.1 | length 6.3
  12V w0.5: R11.1 R10.1 ; F4.2 R11.1@46.834,-87.926
NetF5_1: F5.1 J5-BMS.3
NetF6_1: F6.1 J5-BMS.2 | length 5.6
  12V w0.35: F6.1 42.462,-96.756 J5-BMS.2
NetF6_2: F6.2 Q3.1 R9.2 | length 18.9
  12V w0.254: R9.2@36.159,-91.876 R9.2 R9.2@36.336,-92.053
  12V w0.35: Q3.1 R9.2@36.159,-91.876 ; R9.2@36.336,-92.053 F6.2
NetF7_1: F7.1 J7-MC1.1 | length 24.5
  GND w0.35: v1(17.713,-81.651) 29.729,-93.666 J7-MC1.1
  Signal w0.508: F7.1 v1(17.713,-81.651)
NetF8_1: F8.1 J7-MC1.2 | length 5
  Signal w0.508: F8.1 25.648,-98.57 J7-MC1.2
NetF9_1: F9.1 J7-MC1.3 | length 9.6
  Signal w0.35: J7-MC1.3 34.074,-105.415 F9.1
NetF9_2: F9.2 J4-SWITCHES.10 | length 40.5
  Signal w0.35: F9.2 52.924,-105.415 62.03,-96.308 J4-SWITCHES.10
NetF10_1: F10.1 J7-MC1.4 | length 4.8
  12V w0.254: F10.1 F10.1@22.626,-101.07
  12V w0.35: F10.1@22.626,-101.07 J7-MC1.4
NetF10_2: F10.2 Q3.2 | length 9.9
  12V w0.254: 22.47,-91.224 22.53,-91.164
  12V w0.35: F10.2 22.47,-91.224 ; 22.53,-91.164 Q3.2
NetF11_1: F11.1 J8-MC2.1 | length 8.6
  12V w0.254: J8-MC2.1 -10.48,-95.385 F11.1
NetF11_2: F11.2 J2-LED.4 | length 114.6
  12V w0.254: v1@-2.157,-89.823 v1(-2.129,-89.795)
  12V w0.508: F11.2 v1@-2.157,-89.823
  5V w0.508: v1(-2.129,-89.795) 10.427,-77.238 10.427,-56.83 14.366,-52.891 17.327,-52.891 21.959,-48.259 21.959,-44.602 J2-LED.4
NetF12_1: F12.1 J8-MC2.4 | length 11.2
  Signal w1.27: F12.1 -12.372,-104.097 -10.48,-102.205 J8-MC2.4
NetJ2-LED_1: J2-LED.1 R2.2 | length 69.7
  Signal w1.143: R2.2 29.257,51.799 59.524,21.532 J2-LED.1
NetJ2-LED_2: J2-LED.2 JB.20 | length 19
  5V w0.508: JB.20 50.13,-11.43 J2-LED.2
NetJ4-SWITCHES_1: J4-SWITCHES.1 JD.19 | length 15.1
  Signal w0.254: J4-SWITCHES.1@59.503,-72.39 J4-SWITCHES.1
  Signal w0.3: JD.19@44.443,-72.39 J4-SWITCHES.1@59.503,-72.39
NetJ4-SWITCHES_2: J4-SWITCHES.2 JD.20 | length 15.1
  Signal w0.254: JD.20@44.443,-74.93 JD.20@44.51,-74.862
  Signal w0.3: JD.20@44.51,-74.862 J4-SWITCHES.2
NetJ4-SWITCHES_6: J4-SWITCHES.6 JD.8 | length 21.5
  Signal w0.254: JD.8@41.903,-69.85 JD.8 JD.8@42.132,-69.85
  Signal w0.3: JD.8@42.132,-69.85 43.392,-71.11 46.895,-71.11 47.323,-70.682 60.35,-70.682 J4-SWITCHES.6
NetJ4-SWITCHES_7: J4-SWITCHES.7 JD.18 | length 24
  Signal w0.254: JD.18@44.443,-69.85 JD.18
  Signal w0.3: JD.18 61.971,-69.85 63.74,-71.619 63.74,-73.152 J4-SWITCHES.7
NetJ6-DASH_1: J6-DASH.1 JD.10 | length 24.8
  GND w0.254: J6-DASH.1@39.117,-98.409 39.117,-77.715 JD.10@41.903,-74.93
  5V w0.254: J6-DASH.1 J6-DASH.1@39.117,-98.409
NetJ6-DASH_2: J6-DASH.2 JD.9 | length 28.4
  GND w0.254: J6-DASH.2 36.469,-77.823 JD.9@41.903,-72.39
NetJ6-DASH_6: J6-DASH.6 JD.6 | length 41.2
  GND w0.254: J6-DASH.6 32.041,-99.129 32.041,-74.639 JD.6
NetJ9-CAN_4: J9-CAN.4 JB.10 | length 76.9
  5V w0.508: J9-CAN.4 33.103,-11.43 JB.10@41.903,-11.43
NetJ9-CAN_5: J9-CAN.5 JB.9 | length 76.9
  5V w0.508: J9-CAN.5 33.143,-8.89 JB.9@41.903,-8.89
NetJ9-CAN_8: J9-CAN.8 J10-IMU.4 JC.1 | length 49.3
  12V w0.254: -2.555,-52.049 -2.535,-52.07
  12V w1.016: J9-CAN.8 -18.236,-62.1 -20.839,-59.497 -20.839,-56.247 -16.661,-52.07 -7.697,-52.07 -7.676,-52.049 -2.555,-52.049 ; J10-IMU.4 -14.697,-43.93 -9.41,-43.93 JC.1 -2.535,-52.07
NetJ10-IMU_1: J10-IMU.1 JC.4 | length 17.9
  Signal w0.35: J10-IMU.1 -12.012,-48.955 JC.4@-1.277,-59.69
NetJ10-IMU_2: J10-IMU.2 JC.3 | length 17.9
  Signal w0.35: J10-IMU.2 -11.972,-46.455 JC.3@-1.277,-57.15
NetJ11-XBEE_2: J11-XBEE.2 JA.3 | length 23.3
  Signal w0.254: J11-XBEE.2 -4.782,2.845 JA.3@-1.277,6.35
NetJ11-XBEE_3: J11-XBEE.3 JA.4 | length 21.6
  GND w0.254: J11-XBEE.3 -6.782,-1.695 JA.4@-1.277,3.81
NetJ11-XBEE_5: J11-XBEE.5 JA.5 | length 20.7
  12V w0.254: J11-XBEE.5 -10.782,-8.235 JA.5@-1.277,1.27
NetJA_13: JA.13 R7.1 R8.1 | length 35.7
  12V w0.254: R8.1@1.934,37.272 R8.1
  12V w0.35: JA.13@1.263,6.35 2.603,6.35 3.254,7.001 3.254,13.113 1.954,14.413 R8.1 ; R8.1@1.934,37.272 R7.1
NetJD_2: JD.2 R4.2 | length 3.8
  Signal w0.254: R4.2 38.129,-54.61 JD.2@41.903,-54.61
NetJD_7: JD.7 R5.2 | length 4
  Signal w0.254: R5.2 39.086,-67.31 JD.7@41.903,-67.31
NetQ1_1: Q1.2 R4.1 | length 3
  Signal w0.254: Q1.2 37.535,-57.315 R4.1
NetQ2_1: Q2.2 R5.1 | length 3.1
  Signal w0.254: Q2.2 35.536,-65.444 37.652,-65.444 R5.1
NetQ4_1: Q4.1 R10.2 | length 18.8
  12V w0.762: Q4.1 29.551,-76.836 33.267,-76.836 41.673,-85.242 R10.2
NetR1_2: R1.2 R2.1 | length 4.1
  Signal w0.254: R2.1@28.752,60.41 29.258,60.916 R2.1@29.248,60.926 ; R2.1@29.398,60.768 R2.1@29.495,60.865
  Signal w1.016: R2.1@29.248,60.926 R1.2
NetR6_1: R6.1 R7.2 | length 3.2
  12V w0.254: R7.2 R7.2@-1.308,39.983
  12V w0.35: R7.2@-1.308,39.983 R6.1
V_RX1_N: J9-CAN.3 JC.6 | length 15.1
  GND w0.5: J9-CAN.3 v1@-8.445,-62.1
  5V w0.381: J9-CAN.3 J9-CAN.3@-14.936,-62.23
  5V w0.5: v1@-8.445,-62.1 -5.775,-64.77 JC.6@-1.277,-64.77
  other v1: -8.411,-62.1
V_RX1_P: J9-CAN.2 JC.5 | length 14.8
  GND w0.5: v1(-8.411,-64.6) -6.041,-62.23 JC.5@-1.277,-62.23
  5V w0.5: J9-CAN.2 v1(-8.411,-64.6)
VCC: 12V.1 "5V Converter.3" C1.1 C2.1 C5.2 C6.2 J2-LED.7 K1.1 K1.2 R6.2 | length 71.1
  Signal w1.143: K1.1 34.898,49.921 65.836,18.983 65.836,4.276 J2-LED.7
VCC_HI: D1.1 F1.2 K1.4 K1.5 K1.6 | length 13
  Signal w0.254: K1.6 K1.6@37.398,54.283
  Signal w1.016: K1.6@37.398,54.283 41.169,58.054 D1.1 41.599,58.056 46.145,58.056 K1.5
pads on no net: J1-BAT.None J2-LED.None J3-PUMP.None J4-SWITCHES.None J5-BMS.None J6-DASH.None J7-MC1.None J8-MC2.None J9-CAN.10 J9-CAN.None J10-IMU.None J11-XBEE.4 J11-XBEE.6 J11-XBEE.7 J11-XBEE.8 J11-XBEE.9 J11-XBEE.11 J11-XBEE.12 J11-XBEE.13 J11-XBEE.15 J11-XBEE.16 J11-XBEE.17 J11-XBEE.18 J11-XBEE.19 J11-XBEE.20 JA.2 JA.6 JA.7 JA.8 JA.9 JA.10 JA.11 JA.14 JA.15 JA.16 JA.18 JA.19 JA.20 JB.1 JB.2 JB.3 JB.4 JB.5 JB.6 JB.7 JB.8 JB.11 JB.12 JB.13 JB.14 JB.15 JB.16 JB.17 JB.18 JB.19 JC.2 JC.7 JC.8 JC.9 JC.10 JC.11 JC.13 JC.14 JC.15 JC.16 JC.17 JC.18 JC.19 JC.20 JD.1 JD.3 JD.4 JD.11 JD.12 JD.13 JD.14 JD.15 JD.16 JD.17
copper on no net: | length 41.8
  Signal w0.254: 21.608,433.98 23.031,435.403 62.831,435.403
  other v1: -25.252,59.088

## Polygon pours and split planes (outlines as drawn)
no net on 12V "GND-No Net" (solid, pour order 90): 35.03,11.47
VCC_HI on 12V "12V-VCC_HI" (solid, pour order 24): 42.664,65.84 42.664,44.54 57.064,44.54 57.064,65.842
NetF1_1 on 12V "12V-NetF1_1" (solid, pour order 20): 56.964,65.866 56.964,44.54 72.764,44.54 72.764,65.84
Net12V_5 on 12V "12V-Net12V_5" (solid, pour order 36): -4.666,-111.96 -4.595,-111.888 -4.595,-94.006 18.214,-94.006 18.214,-111.96 72.776,-111.96 72.85,44.222 36.459,44.222 35.502,44.222 35.502,13.549 0.562,13.549 0.562,21.098 -10.142,21.098 -10.142,10.51 -21.886,10.51 -21.886,20.197 -24.252,20.197 -28.836,20.197 -28.836,-111.96
GND on 12V "12V-GND 4" (solid, pour order 6): 40.855,-14.482 41.016,-14.644 41.016,-38.586 59.517,-38.586 64.045,-38.586 64.045,-14.53
VCC on 12V "12V-VCC" (solid, pour order 60): 18.857,65.84 42.664,65.84 42.664,44.308 42.654,44.299 42.352,44.601 -18.3,44.601 -18.3,65.825 -18.316,65.84 -2.291,65.84 -2.291,59.104 -2.268,59.081 -2.245,59.104 9.34,59.104 9.34,54.261 18.857,54.261
NetCH1_1 on 12V "12V-NetCH1_1" (solid, pour order 10): 24.551,-50.491 24.551,-74.079 38.685,-74.079 38.685,-49.257 44.202,-43.74 44.202,-39.76 29.299,-48.587
NetF5_1 on 12V "12V-Net12V_5 1" (solid, pour order 0): 45.444,-100.049 56.142,-100.048 56.142,-102.713 45.42,-102.713
"Net5V Converter_4" on 12V "12V-Net5V Converter_4" (solid, pour order 50): 24.415,44.339 24.415,27.71 9.525,27.71 9.472,27.657 9.662,27.466 9.662,23.905 0.838,23.905 0.838,44.339
Net12V_4 on 12V "12V-Net12V_4" (solid, pour order 30): -18.3,44.357 -18.3,21.233 0.498,21.233 0.498,44.339
no net on 12V "12V-No Net 4" (solid, pour order 76): 47.143,-11.984
no net on 12V "12V-No Net 3" (solid, pour order 74): 44.683,-39.6
no net on 12V "12V-No Net 2" (solid, pour order 72): 26.043,-49.811
no net on 12V "12V-No Net" (solid, pour order 40): 35.083,44.24
no net on 12V "12V-No Net 1" (solid, pour order 14): 60.185,65.405
GND on 12V "12V-GND 1" (solid, pour order 44): 35.25,44.355 35.25,20.136 34.999,20.136 9.8,20.136 9.8,27.362 9.868,27.431 23.082,27.431 23.082,44.248 25.164,44.388
GND on 12V "12V-GND" (solid, pour order 54): -2.291,65.84 -2.291,59.059 -2.245,59.104 9.34,59.104 9.34,54.261 18.857,54.261 18.857,65.66 18.857,65.84
GND on 12V "12V-GND 2" (solid, pour order 34): -21.646,20.373 -21.646,14.488 -21.646,10.726 -10.363,10.726 -10.363,20.316
GND on 12V "12V-GND 3" (solid, pour order 28): -28.836,65.84 -18.453,65.84 -18.453,20.543 -28.836,20.536
NetCH1_3 on 12V "12V-NetCH1_3" (solid, pour order 8): 44.417,-39.794 44.417,-45.899 44.469,-45.95 65.196,-45.95 65.196,-39.024 65.196,-38.904 44.553,-38.929 44.392,-38.767
NetC3_1 on 12V "12V-NetC3_1" (solid, pour order 52): 9.557,23.585 0.75,23.585 0.75,13.725 35.253,13.725 35.253,19.958 9.491,19.958
GND on GND "GND-GND" (solid, pour order 102): -29.465,65.84 -29.465,-111.959 -4.666,-111.959 -4.666,-94.077 18.143,-94.077 18.15,-94.07 18.214,-94.133 18.214,-111.959 72.763,-111.959 72.764,-111.96 72.764,66.469 -28.836,66.469
NetD7_2 on Signal "Signal-NetD7_2" (solid, pour order 88): -17.389,-109.412 -4.689,-109.412 -4.666,-109.412 -4.666,-94.006 10.721,-94.001 10.721,-80.005 10.639,-80.087 -17.389,-80.087
no net on Signal "Signal-No Net" (solid, pour order 12): 57.461,65.379
NetD7_1 on Signal "Signal-NetD7_1" (solid, pour order 80): 3.879,-61.949 3.93,-79.085 18.601,-79.085 18.601,-61.898
GND on Signal "Signal-GND" (solid, pour order 64): -16.943,3.087 -7.631,3.088 -7.631,10.248 -16.918,10.248
GND on Signal "Signal-GND 1" (solid, pour order 70): -8.994,-16.95 -8.921,-16.878 -4.288,-16.878 -4.5,-25.452 -4.94,-26.341 -4.94,-29.852 -8.994,-29.852
NetC3_1 on 5V "5V-NetC3_1" (solid, pour order 26): -4.791,-111.96 -4.562,-111.731 -4.562,-94.046 18.145,-94.046 18.182,-91.879 18.182,-111.96 72.764,-111.96 72.764,65.84 -28.836,65.84 -28.836,-111.96

## Silkscreen, mask and mechanical layers (free items; w line width, h text height)
Top Overlay:
  drawing of 11 lines, arcs and shapes, not listed
  text "Designed By: / David Spivey" at 46.28,37.15 h1.52
  text "BOLT" at 46.57,31.541 h3
  text "AT VIRGINIA TECH" at 46.38,29.982 h0.7
  text "PF1" at 36.703,10.922 h1.02
  text "GND" at 46.151,10.902 h1.02
  text "3V3" at -6.023,10.842 h1.02
  text "5V" at 3.277,10.842 h1.02
  text "PF2" at 36.703,8.382 h1.02
  text "PM3" at 46.101,8.382 h1.02
  text "PE4" at -5.973,8.332 h1.02
  text "GND" at 3.297,8.272 h1.02
  text "PF3" at 36.703,5.842 h1.02
  text "PH2" at 46.101,5.842 h1.02
  text "PC4" at -5.973,5.792 h1.02
  text "PE0" at 3.425,5.792 h1.02
  text "PG0" at 36.703,3.302 h1.02
  text "PH3" at 46.101,3.302 h1.02
  text "PC5" at -5.973,3.252 h1.02
  text "PE1" at 3.425,3.252 h1.02
  text "PL4" at 36.703,0.762 h1.02
  text "RST" at 46.101,0.762 h1.02
  text "PC6" at -5.973,0.712 h1.02
  text "PE2" at 3.425,0.712 h1.02
  text "PL5" at 36.703,-1.778 h1.02
  text "PD1" at 46.101,-1.778 h1.02
  text "PE5" at -5.973,-1.828 h1.02
  text "PE3" at 3.425,-1.828 h1.02
  text "PL0" at 36.703,-4.318 h1.02
  text "PD0" at 46.101,-4.318 h1.02
  text "PD3" at -5.973,-4.368 h1.02
  text "PD7" at 3.425,-4.368 h1.02
  text "PL1" at 36.703,-6.858 h1.02
  text "PN2" at 46.101,-6.858 h1.02
  text "PC7" at -5.973,-6.908 h1.02
  text "PD6" at 3.425,-6.908 h1.02
  text "PL2" at 36.703,-9.398 h1.02
  text "PN3" at 46.101,-9.398 h1.02
  text "PB2" at -5.973,-9.448 h1.02
  text "PM4" at 3.425,-9.448 h1.02
  text "PL3" at 36.703,-11.938 h1.02
  text "PP2" at 46.101,-11.938 h1.02
  text "PB3" at -5.973,-11.988 h1.02
  text "PM5" at 3.425,-11.988 h1.02
  text "3V3" at -6.359,-52.498 h1.02
  text "GND" at 46.152,-52.571 h1.02
  text "PG1" at 37.26,-52.62 h1.02
  text "5V" at 3.011,-52.638 h1.02
  text "PK4" at 37.21,-55.067 h1.02
  text "PM7" at 46.152,-55.067 h1.02
  text "PD2" at -6.477,-55.118 h1.02
  text "GND" at 3.001,-55.288 h1.02
  text "PK5" at 37.28,-57.62 h1.02
  text "PP5" at 46.152,-57.607 h1.02
  text "PP0" at -6.477,-57.658 h1.02
  text "PB4" at 2.921,-57.658 h1.02
  text "PM0" at 37.26,-60.147 h1.02
  text "PA7" at 46.152,-60.147 h1.02
  text "PP1" at -6.477,-60.198 h1.02
  text "PB5" at 2.921,-60.198 h1.02
  text "PM1" at 37.29,-62.6 h1.02
  text "RST" at 46.152,-62.687 h1.02
  text "*RX" at -6.477,-62.738 h1.02
  text "PK0" at 2.921,-62.738 h1.02
  text "PM2" at 37.21,-65.19 h1.02
  text "PQ2" at 46.152,-65.227 h1.02
  text "*TX" at -6.477,-65.278 h1.02
  text "PK1" at 2.921,-65.278 h1.02
  text "PQ3" at 46.152,-67.767 h1.02
  text "PH0" at 37.19,-67.79 h1.02
  text "PQ0" at -6.477,-67.818 h1.02
  text "PK2" at 2.921,-67.818 h1.02
  text "PH1" at 37.19,-70.32 h1.02
  text "PP3" at 46.152,-70.307 h1.02
  text "PP4" at -6.477,-70.358 h1.02
  text "PK3" at 2.921,-70.358 h1.02
  text "PK6" at 37.12,-72.81 h1.02
  text "PQ1" at 46.152,-72.847 h1.02
  text "PN5" at -6.477,-72.898 h1.02
  text "PA4" at 2.921,-72.898 h1.02
  text "PK7" at 36.754,-75.387 h1.02
  text "PM6" at 46.152,-75.387 h1.02
  text "PN4" at -6.477,-75.438 h1.02
  text "PA5" at 2.921,-75.946 h1.02
Bottom Overlay:
  text "JB" at 44.84,13.82 h1.52
  text "JA" at 1.38,13.7 h1.52
  text "JD" at 44.5,-49.54 h1.52
  text "JC" at 1.2,-49.58 h1.52
Mechanical 1:
  lines w0.75: -28.836,-111.96 -28.836,65.841 ; -28.836,-111.959 -4.666,-111.959 -4.666,-94.077 ; -28.836,65.84 -9.786,65.84 53.714,65.84 72.764,65.84 ; -4.595,-94.006 -4.666,-94.077 ; 18.15,-94.07 18.214,-94.006 ; 72.764,-111.959 72.764,65.841 ; 72.776,-111.959 18.214,-111.959 18.214,-94.077 -4.666,-94.077 ; 72.764,-111.96 72.764,-111.96
Mechanical 17:
  text ".Layer_Name" at -155.168,-120.057 h1.52
Mechanical 18:
  text ".Layer_Name" at -155.168,-120.057 h1.52
Mechanical 19:
  text ".Layer_Name" at -155.168,-120.057 h1.52

## Dimensions
-28.836,-111.959 to -28.836,65.84 on Signal
-28.836,65.84 to 72.764,65.84 on Signal

## Text inside footprints (layer, text, board x,y; h text height)
D5: Mechanical 13 "*" at 22.791,-87.976 h1.27; Bottom Overlay "*" at 24.111,-87.595 h0.51
F5: Mechanical 13 "*" at 54.566,-101.644 h1.27